# EAGLE board Ploughmeter 3.0 (EAGLE 9.6.2)
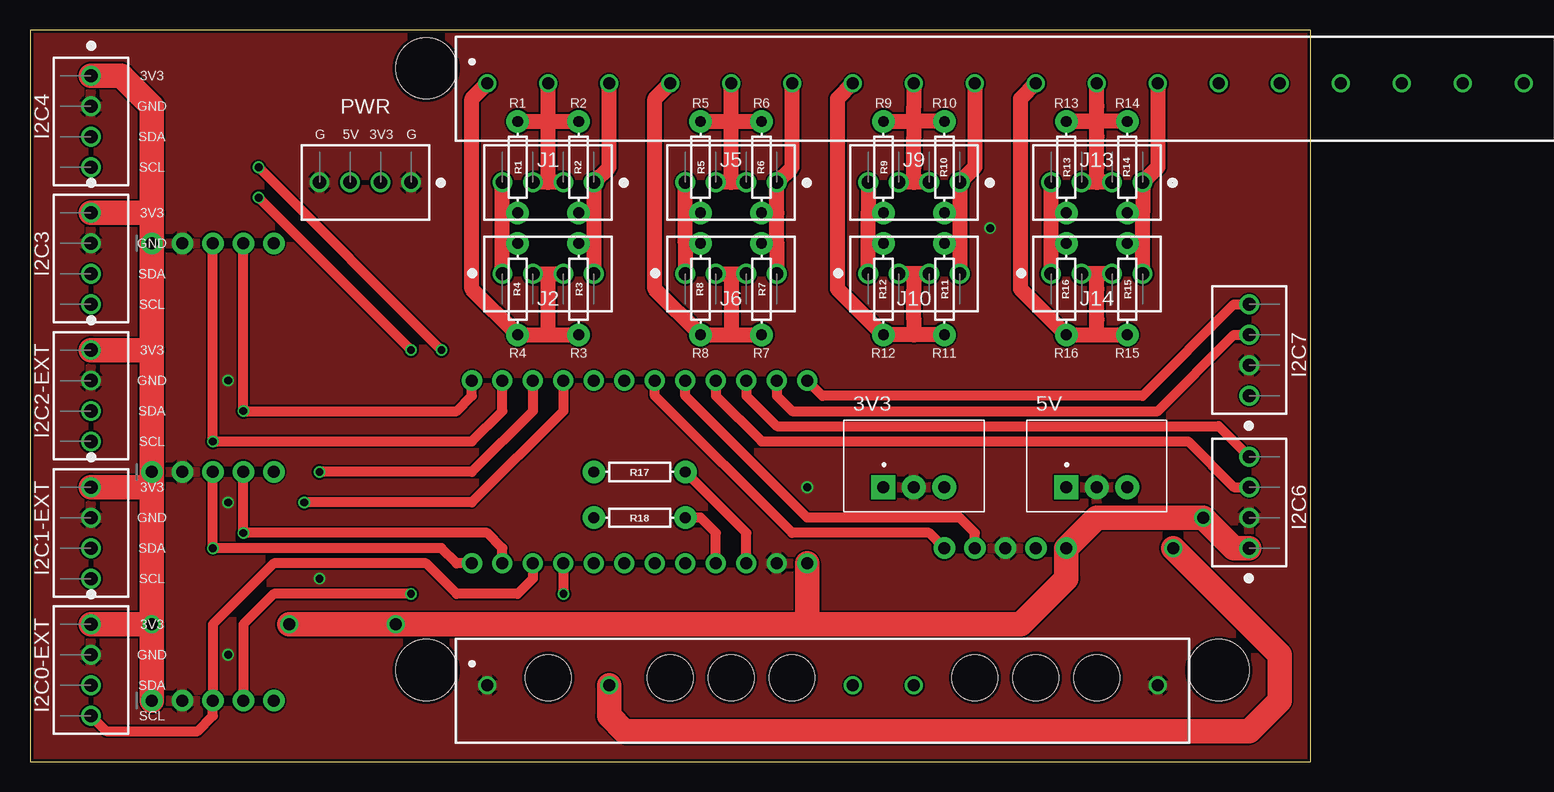
[diagram p0: board, top side]
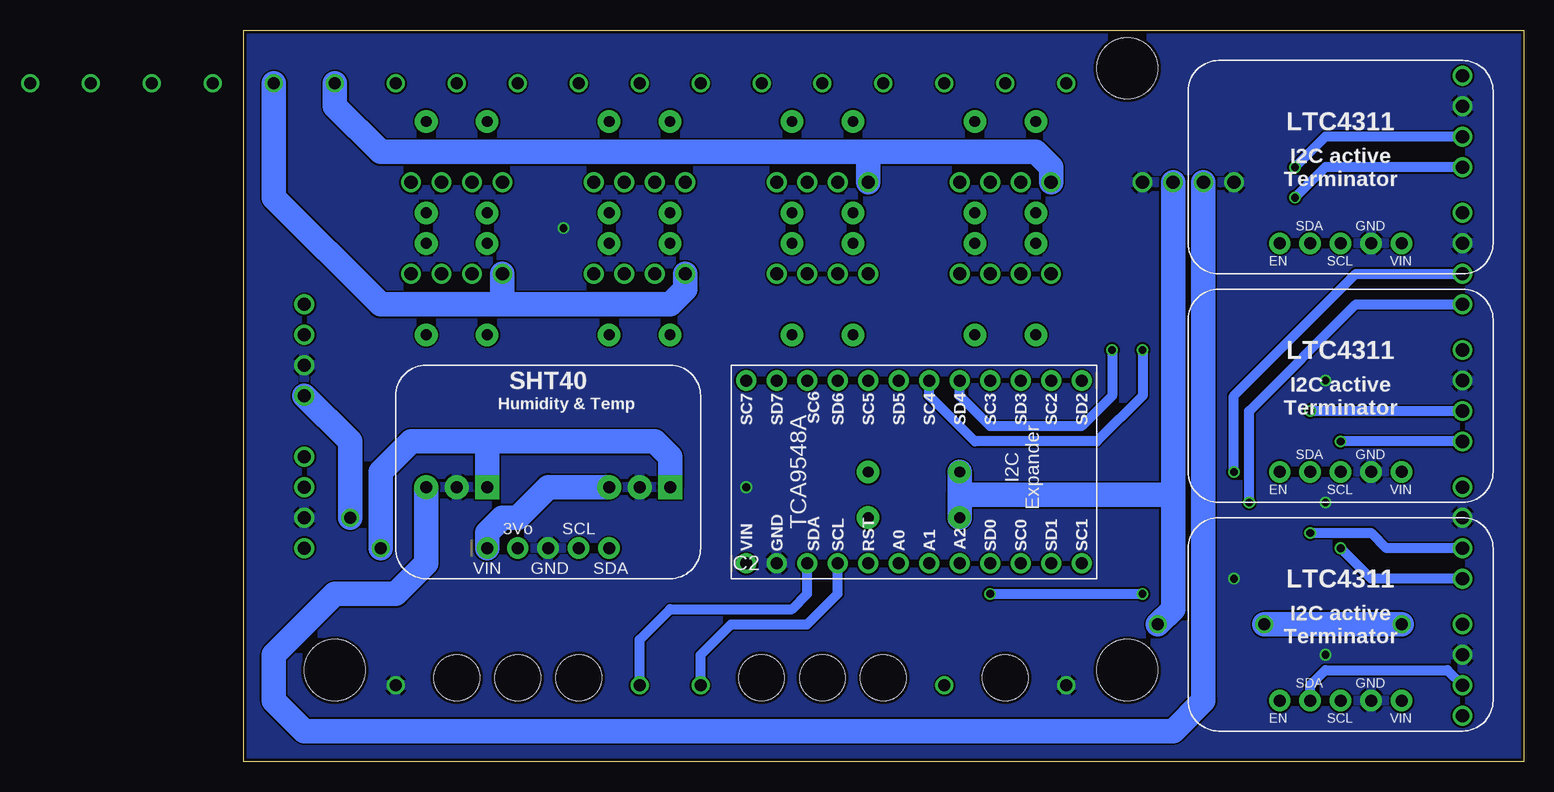
[diagram p1: board, bottom side, seen from below]

Size 106.68 x 60.96 mm. Coordinates in mm from the lower left corner, seen from the top.
Outline: 0,0 106.68,0 106.68,60.96 0,60.96 0,0
Copper layers (1*16): Top 0.018mm / dielectric 1.55mm / Bottom 0.018mm
Design rules "eC_2Layer_PClass6_BaseCopperO18_eCDefault": minimum track width 0.15mm, minimum drill 0.35mm, track to track 0.15mm, track to pad 0.15mm, pad to pad 0.15mm, via to via 0.15mm, smd to smd 0mil, copper to edge 0.25mm, drill to drill 0.35mm, minimum pad ring 0.175mm, minimum via ring 0.125mm, stop-mask expansion 0mil, vias tented up to drill 0.45mm, thermal gap 0.2mm
Net classes: 1 highpower: width 0.406 mm, drill 0.483 mm; 2 lowpower: width 0.254 mm, drill 0.483 mm
Holes 3.81 mm at 53.34,6.98 43.18,6.98 58.42,6.98 63.5,6.98 78.74,6.98 83.82,6.98 88.9,6.98
Holes 5.08 mm at 33.02,7.62 99.06,7.62 33.02,57.79

## Footprints (pad centres in the part's own frame; a part is rotated, then mirrored left to right if it is on the bottom)
173010535 = drill 1 pad 2 square: 1 -2.54,0 | drill 1 pad 2: 2 0,0; 3 2.54,0
WURTH_CONNECTORS_WR-TBL-PLUGGABLE-CONNECTOR_691311500018 = drill 1: 1 -43.18,0; 2 -38.1,0; 3 -33.02,0; 4 -27.94,0; 5 -22.86,0; 6 -17.78,0; 7 -12.7,0; 8 -7.62,0; 9 -2.54,0; 10 2.54,0; 11 7.62,0; 12 12.7,0; 13 17.78,0; 14 22.86,0; 15 27.94,0; 16 33.02,0; 17 38.1,0; 18 43.18,0
WURTH_CONNECTORS_WR-TBL-PLUGGABLE-CONNECTOR_691311500012 = drill 1: 1 -27.94,0; 2 -22.86,0; 3 -17.78,0; 4 -12.7,0; 5 -7.62,0; 6 -2.54,0; 7 2.54,0; 8 7.62,0; 9 12.7,0; 10 17.78,0; 11 22.86,0; 12 27.94,0
1X05_ROUND_70 = drill 1 pad 1.778: 1 -5.08,0; 2 -2.54,0; 3 0,0; 4 2.54,0; 5 5.08,0
1725672-4-2.54 = drill 1.1 pad 1.65: 1 0,0; 2 2.54,0; 3 5.08,0; 4 7.62,0
1X12_ROUND = drill 1 pad 1.676: 1 -13.97,0; 2 -11.43,0; 3 -8.89,0; 4 -6.35,0; 5 -3.81,0; 6 -1.27,0; 7 1.27,0; 8 3.81,0; 9 6.35,0; 10 8.89,0; 11 11.43,0; 12 13.97,0
AXIAL-0.3 = drill 0.9 pad 1.88: P$1 -3.81,0; P$2 3.81,0

## Placement (x,y rotation side)
3V3  173010535  [173010535]  73.66,22.86 0 top
5V  173010535  [173010535]  88.9,22.86 0 top
C1  [WURTH_CONNECTORS_WR-TBL-PLUGGABLE-CONNECTOR_691311500018]  81.28,56.52 0 top
C2  [WURTH_CONNECTORS_WR-TBL-PLUGGABLE-CONNECTOR_691311500012]  66.04,6.35 0 top
EX0  [1X05_ROUND_70]  15.24,5.08 0 top
EX1  [1X05_ROUND_70]  15.24,24.13 0 top
EX5  [1X05_ROUND_70]  15.24,43.18 0 top
I2C0-EXT  1725672  [1725672-4-2.54]  5.08,11.43 270 top
I2C1-EXT  1725672  [1725672-4-2.54]  5.08,22.86 270 top
I2C2-EXT  1725672  [1725672-4-2.54]  5.08,34.29 270 top
I2C3  1725672  [1725672-4-2.54]  5.08,45.72 270 top
I2C4  1725672  [1725672-4-2.54]  5.08,57.15 270 top
I2C6  1725672  [1725672-4-2.54]  101.6,17.78 90 top
I2C7  1725672  [1725672-4-2.54]  101.6,30.48 90 top
J1  1725672  [1725672-4-2.54]  46.99,48.26 180 top
J2  1725672  [1725672-4-2.54]  39.37,40.64 0 top
J5  1725672  [1725672-4-2.54]  62.23,48.26 180 top
J6  1725672  [1725672-4-2.54]  54.61,40.64 0 top
J9  1725672  [1725672-4-2.54]  77.47,48.26 180 top
J10  1725672  [1725672-4-2.54]  69.85,40.64 0 top
J13  1725672  [1725672-4-2.54]  92.71,48.26 180 top
J14  1725672  [1725672-4-2.54]  85.09,40.64 0 top
JP2  [1X12_ROUND]  50.8,16.51 0 bottom
JP4  [1X12_ROUND]  50.8,31.75 180 bottom
JP5  [1X05_ROUND_70]  81.28,17.78 0 bottom
PWR  1725672  [1725672-4-2.54]  31.75,48.26 180 top
R1  350  [AXIAL-0.3]  40.64,49.53 270 top
R2  350  [AXIAL-0.3]  45.72,49.53 90 top
R3  350  [AXIAL-0.3]  45.72,39.37 270 top
R4  350  [AXIAL-0.3]  40.64,39.37 90 top
R5  350  [AXIAL-0.3]  55.88,49.53 270 top
R6  350  [AXIAL-0.3]  60.96,49.53 90 top
R7  350  [AXIAL-0.3]  60.96,39.37 270 top
R8  350  [AXIAL-0.3]  55.88,39.37 90 top
R9  350  [AXIAL-0.3]  71.12,49.53 270 top
R10  350  [AXIAL-0.3]  76.2,49.53 90 top
R11  350  [AXIAL-0.3]  76.2,39.37 270 top
R12  350  [AXIAL-0.3]  71.12,39.37 90 top
R13  350  [AXIAL-0.3]  86.36,49.53 270 top
R14  350  [AXIAL-0.3]  91.44,49.53 90 top
R15  350  [AXIAL-0.3]  91.44,39.37 270 top
R16  350  [AXIAL-0.3]  86.36,39.37 90 top
R17  10k  [AXIAL-0.3]  50.8,24.13 180 top
R18  10k  [AXIAL-0.3]  50.8,20.32 180 top

## Library data of the parts
3V3 5V = DC-DC Converter; CREATED_BY: PCBLayout.com; DIGIKEY_PARTNO: 732-173010535-ND; MANUFACTURER: Würth Elektronik; MPN: 173010535
C1 = CR6; DATASHEET-URL: https://www.we-online.com/catalog/datasheet/691311500018.pdf; IR-UL: 20A; IR-VDE: 20A; MOUNT: THT; PART-NUMBER: 691311500018; PINS: 18; PITCH: 5.08mm; TYPE: Vertical; WORKING-VOLTAGE-UL: 300V (AC); WORKING-VOLTAGE-VDE: 300V (AC)
C2 = CR6; DATASHEET-URL: https://www.we-online.com/catalog/datasheet/691311500012.pdf; IR-UL: 20A; IR-VDE: 20A; MOUNT: THT; PART-NUMBER: 691311500012; PINS: 12; PITCH: 5.08mm; TYPE: Vertical; WORKING-VOLTAGE-UL: 300V (AC); WORKING-VOLTAGE-VDE: 300V (AC)
EX0 EX1 EX5 JP2 JP4 JP5 = microbuilder
I2C0-EXT I2C1-EXT I2C2-EXT I2C3 I2C4 I2C6 I2C7 J1 J2 J5 J6 J9 J10 J13 J14 PWR = Backplate_2; ALLIED_NUMBER: 70054337; DESCRIPTION: 4 way vertical PCB terminal,6A 63V Phoenix Contact Non-Fused Terminal Block, 4 Way, Solder Terminals, 26 ??? 20 AWG Through Hole, Nylon, 63 V; HEIGHT: mm; MANUFACTURER_NAME: Phoenix Contact; MANUFACTURER_PART_NUMBER: 1725672; RS_PART_NUMBER: 3924476; RS_PRICE-STOCK: https://uk.rs-online.com/web/p/products/3924476
R1-R18 = SparkFun-Resistors; PROD_ID: RES-8371

## Nets
0SCL: EX0.3 I2C0-EXT.4 JP2.10
0SDA: EX0.4 I2C0-EXT.3 JP2.9
1SCL: EX1.3 I2C1-EXT.4 JP2.12
1SDA: EX1.4 I2C1-EXT.3 JP2.11
2SCL: EX5.3 I2C2-EXT.4 JP4.2
2SDA: EX5.4 I2C2-EXT.3 JP4.1
3.3V: JP5.2
3SCL: I2C3.4 JP4.4
3SDA: I2C3.3 JP4.3
3V3: 3V3.3 EX0.1 EX1.1 EX5.1 I2C0-EXT.1 I2C1-EXT.1 I2C2-EXT.1 I2C3.1 I2C4.1 I2C6.1 I2C7.1 JP2.1 JP5.1 PWR.2 R17.P$2 R18.P$2
4SCL: I2C4.4 JP4.6
4SDA: I2C4.3 JP4.5
5SCL: JP4.8 JP5.4
5SDA: JP4.7 JP5.5
5V: 5V.3 PWR.3
6SCL: I2C6.4 JP4.10
6SDA: I2C6.3 JP4.9
7SCL: I2C7.4 JP4.12
7SDA: I2C7.3 JP4.11
12V: C2.5
A0: JP2.6
A1: JP2.7
A2: JP2.8
C1/SCL: C2.7 JP2.4 R18.P$1
C2/SDA: C2.8 JP2.3 R17.P$1
C3: C2.9
C4: C2.10
G1: 3V3.2 5V.2 C2.1 C2.12 EX0.2 EX1.2 EX5.2 I2C0-EXT.2 I2C1-EXT.2 I2C2-EXT.2 I2C3.2 I2C4.2 I2C6.2 I2C7.2 JP2.2 JP5.3 PWR.1 PWR.4
G2: C2.4
G3: C2.6
RESET: JP2.5
RG: C2.11
SG1: C1.3 J1.1 J2.4 R2.P$1 R3.P$1
SG2: C1.6 J5.1 J6.4 R6.P$1 R7.P$1
SG3: C1.9 J9.1 J10.4 R10.P$1 R11.P$1
SG4: C1.12 J13.1 J14.4 R14.P$1 R15.P$1
SG5: C1.15
SG6: C1.18
SW12-1: C2.2
SW12-2: 3V3.1 5V.1 C2.3
U1: C1.1 J2.2 J2.3 R3.P$2 R4.P$1
U2: C1.2 J1.2 J1.3 R1.P$1 R2.P$2
U3: C1.4 J6.2 J6.3 R7.P$2 R8.P$1
U4: C1.5 J5.2 J5.3 R5.P$1 R6.P$2
U5: C1.7 J10.2 J10.3 R11.P$2 R12.P$1
U6: C1.8 J9.2 J9.3 R9.P$1 R10.P$2
U7: C1.10 J14.2 J14.3 R15.P$2 R16.P$1
U8: C1.11 J13.2 J13.3 R13.P$1 R14.P$2
U9: C1.13 J1.4 J2.1 J5.4 J6.1 R1.P$2 R4.P$2 R5.P$2 R8.P$2
U10: C1.14 J9.4 J10.1 J13.4 J14.1 R9.P$2 R12.P$2 R13.P$2 R16.P$2
U11: C1.16
U12: C1.17

## Tracks (layer width: path | path; a pad name or v marks a point on that pad's centre or on a via)
0SCL
  Top 0.813: I2C0-EXT.4 6.35,2.54 13.97,2.54 15.24,3.81 EX0.3 15.24,11.43 20.32,16.51 33.02,16.51 35.56,13.97 40.64,13.97 41.91,15.24 JP2.10
0SDA  (via drill 0.65)
  Top 0.813: EX0.4 17.78,11.43 20.32,13.97 v31.75,13.97 | JP2.9 v44.45,13.97
  Bottom 0.813: EX0.4 17.78,6.35 16.51,7.62 6.35,7.62 I2C0-EXT.3 | v44.45,13.97 v31.75,13.97
1SCL  (via drill 0.65)
  Top 0.813: EX1.3 v15.24,17.78 34.29,17.78 35.56,16.51 JP2.12
  Bottom 0.813: v15.24,17.78 12.7,15.24 I2C1-EXT.4
1SDA  (via drill 0.65)
  Top 0.813: JP2.11 39.37,17.78 38.1,19.05 v17.78,19.05 EX1.4
  Bottom 0.813: v17.78,19.05 12.7,19.05 11.43,17.78 I2C1-EXT.3
2SCL  (via drill 0.65)
  Top 0.813: EX5.3 v15.24,26.67 36.83,26.67 39.37,29.21 JP4.2
  Bottom 0.813: I2C2-EXT.4 v15.24,26.67
2SDA  (via drill 0.65)
  Top 0.813: EX5.4 v17.78,29.21 35.56,29.21 36.83,30.48 JP4.1
  Bottom 0.813: I2C2-EXT.3 v17.78,29.21
3SCL  (via drill 0.65)
  Top 0.813: JP4.4 44.45,29.21 36.83,21.59 v22.86,21.59
  Bottom 0.813: v22.86,21.59 22.86,29.21 13.97,38.1 I2C3.4
3SDA  (via drill 0.65)
  Top 0.813: JP4.3 41.91,29.21 36.83,24.13 v24.13,24.13
  Bottom 0.813: v24.13,24.13 24.13,30.48 13.97,40.64 I2C3.3
3V3  (via drill 1)
  Top 2.032: 64.77,11.43 v30.48,11.43 v21.59,11.43 | v10.16,11.43 EX0.1 | v10.16,11.43 10.16,22.86 | 10.16,22.86 EX1.1 10.16,34.29 | 10.16,34.29 EX5.1 10.16,45.72 | I2C1-EXT.1 10.16,22.86 | I2C0-EXT.1 v10.16,11.43 | JP2.1 64.77,11.43 | I2C4.1 7.62,57.15 10.16,54.61 10.16,45.72 | I2C3.1 10.16,45.72 | I2C2-EXT.1 10.16,34.29 | I2C6.1 100.33,17.78 v97.79,20.32 88.9,20.32 JP5.1 86.36,15.24 82.55,11.43 64.77,11.43
  Bottom 2.032: v10.16,11.43 v21.59,11.43 | v30.48,11.43 29.21,12.7 29.21,22.22 | 29.21,22.22 PWR.2 | v97.79,20.32 97.79,26.67 I2C7.1 | JP5.1 86.36,19.05 85.09,20.32 83.82,20.32 81.28,22.86 3V3.3 | R18.P$2 46.99,22.22 | R17.P$2 46.99,22.22 | 46.99,22.22 29.21,22.22
4SCL  (via drill 0.65)
  Top 0.813: v19.05,46.99 v31.75,34.29
  Bottom 0.813: v19.05,46.99 16.51,49.53 I2C4.4 | v31.75,34.29 31.75,30.48 35.56,26.67 45.72,26.67 49.53,30.48 JP4.6
4SDA  (via drill 0.65)
  Top 0.813: v19.05,49.53 v34.29,34.29
  Bottom 0.813: v19.05,49.53 16.51,52.07 I2C4.3 | v34.29,34.29 34.29,30.48 36.83,27.94 44.45,27.94 46.99,30.48 JP4.5
5SCL
  Top 0.813: JP5.4 78.74,19.05 77.47,20.32 64.77,20.32 54.61,30.48 JP4.8
5SDA
  Top 0.813: JP5.5 74.93,19.05 63.5,19.05 52.07,30.48 JP4.7
5V
  Bottom 2.032: PWR.3 26.67,5.08 29.21,2.54 101.6,2.54 104.14,5.08 104.14,8.89 99.06,13.97 93.98,13.97 91.44,16.51 5V.3
6SCL
  Top 0.813: JP4.10 59.69,30.48 62.23,27.94 99.06,27.94 I2C6.4
6SDA
  Top 0.813: JP4.9 57.15,30.48 60.96,26.67 96.52,26.67 100.33,22.86 I2C6.3
7SCL
  Top 0.813: I2C7.4 100.33,38.1 92.71,30.48 66.04,30.48 JP4.12
7SDA
  Top 0.813: I2C7.3 100.33,35.56 93.98,29.21 63.5,29.21 62.23,30.48 JP4.11
C1/SCL
  Top 0.813: JP2.4 57.15,19.05 55.88,20.32 R18.P$1
  Bottom 0.813: C2.7 68.58,8.89 66.04,11.43 59.69,11.43 57.15,13.97 JP2.4
C2/SDA
  Top 0.813: JP2.3 59.69,19.05 R17.P$1
  Bottom 0.813: C2.8 73.66,10.16 71.12,12.7 60.96,12.7 59.69,13.97 JP2.3
G1  (via drill 0.65)
  other vias: 64.77,22.86 24.13,15.24 16.51,21.59 16.51,31.75 16.51,8.89 80.01,44.45
  pour Top: 0,0 0,63.5 106.68,63.5 106.68,0
  pour Bottom: 0,0 0,62.23 106.68,62.23 106.68,0
SG1
  Top 1.27: C1.3 48.26,49.53 J1.1 46.99,45.72 | 46.99,45.72 46.99,43.18 | R3.P$1 46.99,43.18 | R2.P$1 46.99,45.72 | 46.99,43.18 J2.4
SG2
  Top 1.27: C1.6 63.5,49.53 J5.1 62.23,45.72 | 62.23,43.18 62.23,45.72 | R6.P$1 62.23,45.72 | R7.P$1 62.23,43.18 | 62.23,43.18 J6.4
SG3
  Top 1.27: 77.47,45.72 77.47,43.18 | R10.P$1 77.47,45.72 | R11.P$1 77.47,43.18 | C1.9 78.74,49.53 J9.1 77.47,45.72 | 77.47,43.18 J10.4
SG4
  Top 1.27: 92.71,43.18 92.71,45.72 | R14.P$1 92.71,45.72 | R15.P$1 92.71,43.18 | C1.12 93.98,49.53 J13.1 92.71,45.72 | J14.4 92.71,43.18
SW12-2  (via drill 1)
  Top 2.032: C2.3 48.26,3.81 49.53,2.54 101.6,2.54 104.14,5.08 104.14,8.89 v95.25,17.78
  Bottom 2.032: v95.25,17.78 95.25,24.13 92.71,26.67 86.36,26.67 | 3V3.1 71.12,25.4 72.39,26.67 86.36,26.67 | 5V.1 86.36,26.67
U1
  Top 1.27: 43.18,35.56 R4.P$1 36.83,39.37 36.83,55.25 C1.1 | 43.18,35.56 R3.P$2 | J2.2 43.18,40.64 | 43.18,40.64 J2.3 | 43.18,35.56 43.18,40.64
U2
  Top 1.27: J1.2 43.18,48.26 | 43.18,48.26 J1.3 | R1.P$1 43.18,53.34 | 43.18,53.34 R2.P$2 | 43.18,48.26 43.18,53.34 | 43.18,53.34 C1.2
U3
  Top 1.27: 58.42,35.56 R8.P$1 52.07,39.37 52.07,55.25 C1.4 | 58.42,35.56 R7.P$2 | J6.2 58.42,40.64 | 58.42,40.64 J6.3 | 58.42,40.64 58.42,35.56
U4
  Top 1.27: J5.2 58.42,48.26 | 58.42,48.26 J5.3 | R5.P$1 58.42,53.34 | 58.42,53.34 R6.P$2 | 58.42,53.34 58.42,54.61 C1.5 | 58.42,48.26 58.42,49.53 58.42,52.07 58.42,53.34
U5
  Top 1.27: R11.P$2 73.66,35.56 | 73.66,35.56 R12.P$1 67.31,39.37 67.31,55.25 C1.7 | J10.3 73.66,40.64 | 73.66,40.64 J10.2 | 73.66,40.64 73.66,39.37 73.66,36.83 73.66,35.56
U6
  Top 1.27: J9.2 73.66,48.26 | 73.66,48.26 J9.3 | R9.P$1 73.66,53.34 | R10.P$2 73.66,53.34 | C1.8 73.66,54.61 73.66,53.34 | 73.66,53.34 73.66,52.07 73.66,49.53 73.66,48.26
U7
  Top 1.27: J14.3 88.9,40.64 | 88.9,40.64 J14.2 | 88.9,35.56 R16.P$1 82.55,39.37 82.55,55.25 C1.10 | 88.9,35.56 R15.P$2 | 88.9,35.56 88.9,36.83 88.9,39.37 88.9,40.64
U8
  Top 1.27: R14.P$2 R13.P$1 88.9,53.34 | J13.2 88.9,48.26 | 88.9,48.26 J13.3 | 88.9,48.26 88.9,49.53 88.9,52.07 88.9,53.34 | 88.9,53.34 88.9,54.61 C1.11
U9
  Top 1.27: 54.61,43.18 54.61,45.72 | R5.P$2 54.61,45.72 | R8.P$2 54.61,43.18 | 39.37,43.18 39.37,45.72 | R1.P$2 39.37,45.72 | R4.P$2 39.37,43.18 | J2.1 39.37,43.18 | 39.37,45.72 J1.4 | 54.61,45.72 J5.4 | 54.61,43.18 J6.1
  Bottom 2.032: C1.13 99.06,54.61 95.25,50.8 54.61,50.8 | 54.61,50.8 40.64,50.8 39.37,49.53 J1.4 | J5.4 54.61,50.8
U10
  Top 1.27: 85.09,43.18 85.09,45.72 | R16.P$2 85.09,43.18 | R13.P$2 85.09,45.72 | 69.85,43.18 69.85,45.72 | R12.P$2 69.85,43.18 | R9.P$2 69.85,45.72 | J9.4 69.85,45.72 | J10.1 69.85,43.18 | J14.1 85.09,43.18 | 85.09,45.72 J13.4
  Bottom 2.032: C1.14 104.14,46.99 95.25,38.1 85.09,38.1 | 85.09,38.1 71.12,38.1 69.85,39.37 J10.1 | J14.1 85.09,38.1

## Text on the board
tPlace: 3V3 | GND | R1 | R2 | R5 | R6 | R9 | R10 | R13 | R14 | SDA | G | 5V | 3V3 | G | SCL | 3V3 | GND | SDA | SCL | 3V3 | R4 | R3 | R8 | R7 | R12 | R11 | R16 | R15 | GND | SDA | SCL | 3V3 | GND | SDA | SCL | 3V3 | GND | SDA | SCL
bPlace: LTC4311 | I2C active / Terminator | GND | SDA | VIN | SCL | EN | LTC4311 | SHT40 | I2C active / Terminator | SD2 | SC2 | SD3 | SC3 | SD4 | SC4 | SD5 | SC5 | SD6 | SC6 | SD7 | SC7 | Humidity & Temp | GND | SDA | I2C / Expander | TCA9548A | VIN | SCL | EN | SCL | 3Vo | SC1 | SD1 | SC0 | SD0 | A2 | A1 | A0 | RST | SCL | SDA | GND | VIN | SDA | GND | VIN | LTC4311 | I2C active / Terminator | GND | SDA | VIN | SCL | EN